# Altium PCB SIMCARD_PCB.PcbDoc
Units mm, origin at the board's own origin, x right, y up, seen from the top; angles counter-clockwise.
Board outline 43.08 x 76.9 mm, 2 copper layers (Top Layer, Bottom Layer); 48 components, 35 nets, 184 pads, 295 vias.
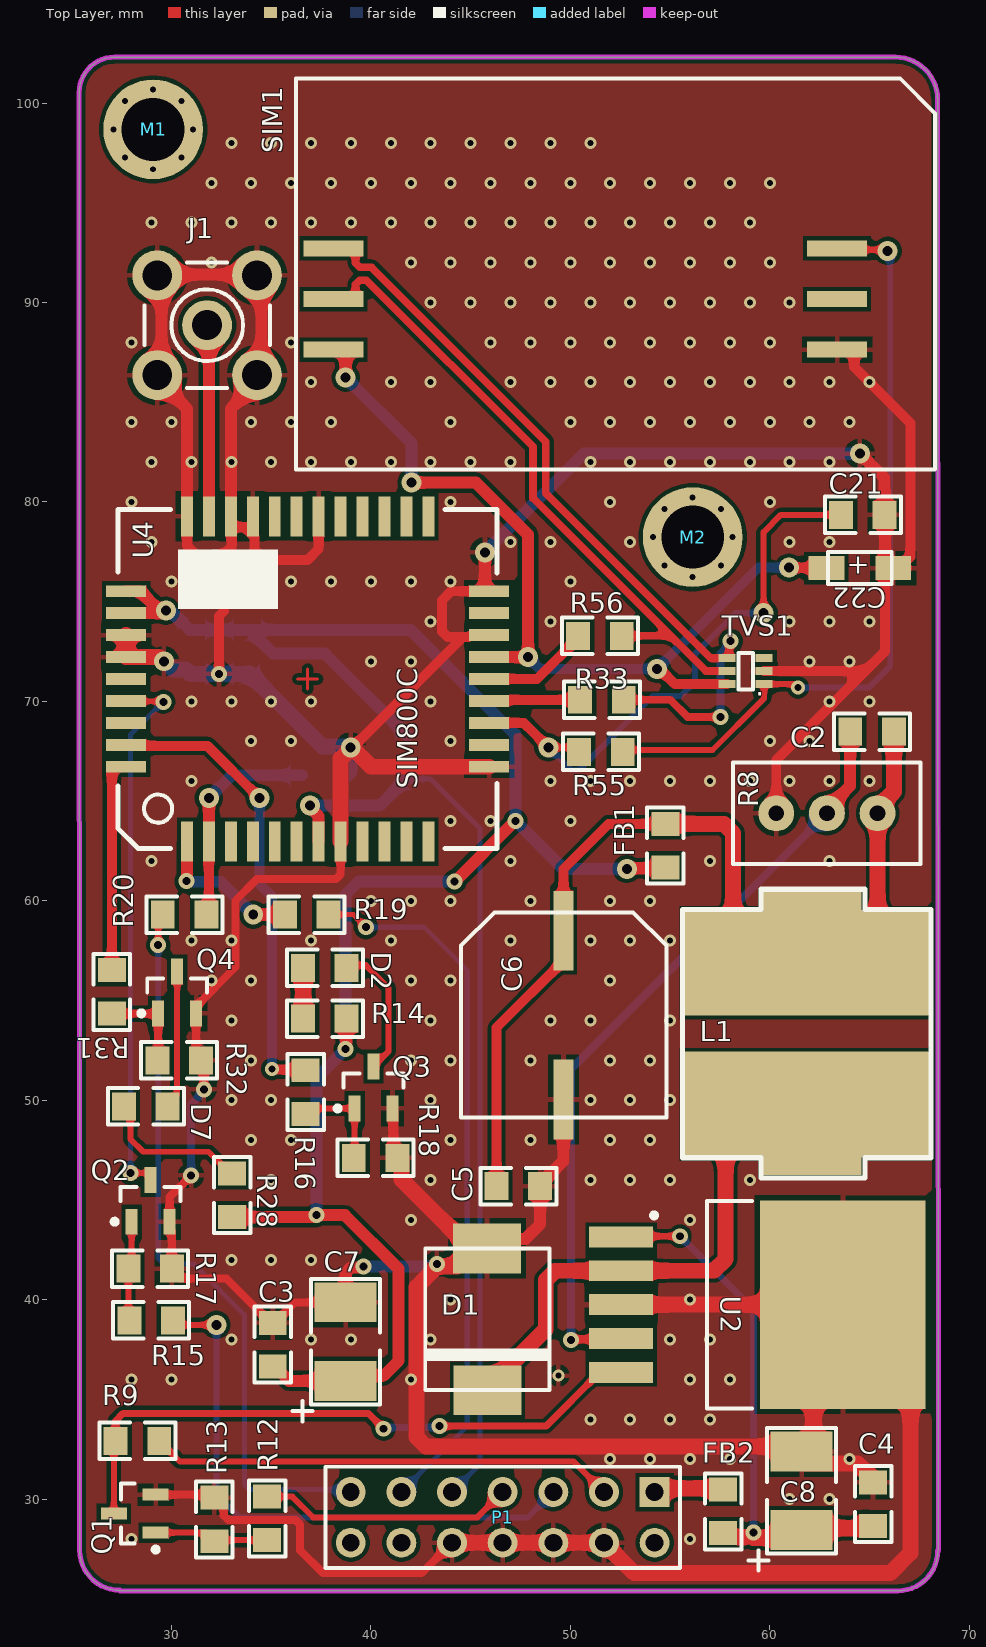
[diagram p0: Top Layer view]
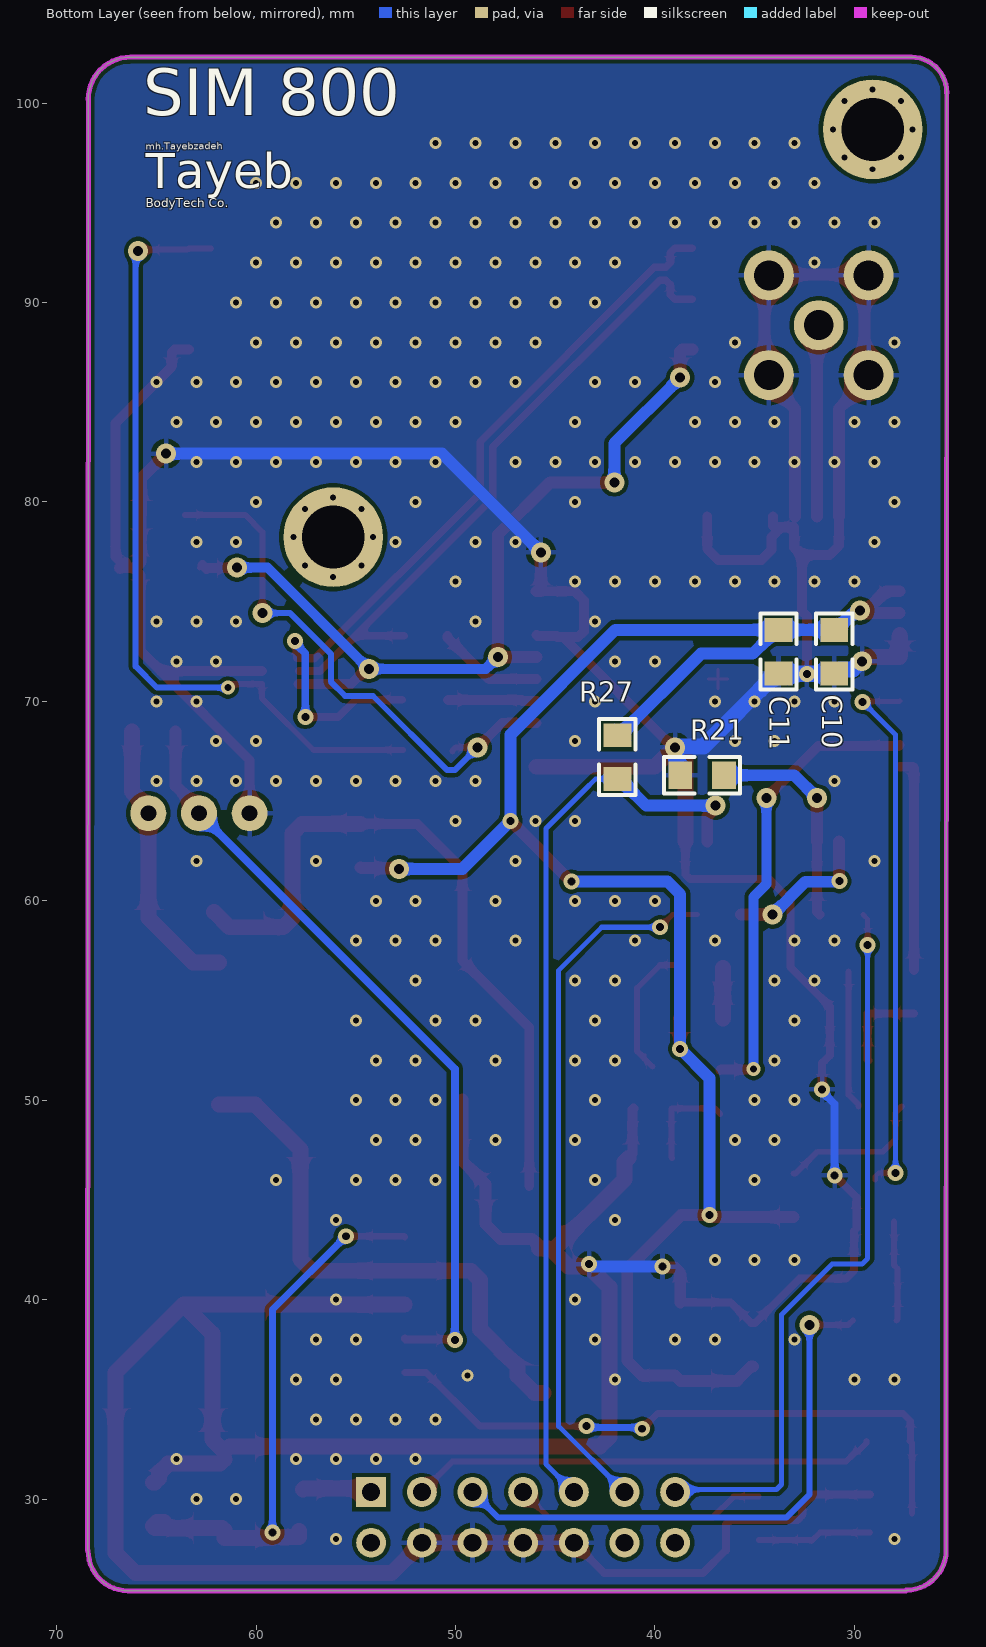
[diagram p1: Bottom Layer view, seen from below]

## Layer stack, top to bottom
Top Solder: solder mask 0.0102, Solder Resist, Dk 3.5
Top Layer: signal copper 0.0356
Dielectric 1: dielectric 0.32, FR-4, Dk 4.8
Bottom Layer: signal copper 0.0356
Bottom Solder: solder mask 0.0102, Solder Resist, Dk 3.5

## Board outline
25.4,27.432 25.372,100.514 cw(c27.146,100.526) 27.146,102.3 66.292,102.299 cw(c66.306,100.19) 68.415,100.19 68.453,27.413 68.421,27.413 cw(c66.421,27.4) 66.421,25.4 27.413,25.4 27.413,25.432 cw(c27.4,27.432)

## Design rules (kind name [scope] priority, off if disabled: settings)
Clearance "Stitching GND" [IsStitchingVia and InNet('GND') vs (IsVia and (Not IsStitchingVia)) Or IsPad] p1: gap=0.4 ignorepadtopadclearanceinfootprint=FALSE
Clearance [All] p2: gap=0.2 ignorepadtopadclearanceinfootprint=FALSE
DiffPairsRouting [All] p1: maxlimit=0.254 minlimit=0.254 mostfreqgap=0.254 toplayer_minwidth=0.381 toplayer_maxwidth=0.381 toplayer_prefwidth=0.381 bottomlayer_minwidth=0.381 bottomlayer_maxwidth=0.381 bottomlayer_prefwidth=0.381 maxuncoupledlength=12.7
PolygonConnect [All] p1: connectstyle=Relief reliefconductorwidth=0.254 reliefentries=4 polygonreliefangle="90 Angle" airgapwidth=0.254
RoutingVias [All] p1: holewidth=0.711 width=1.27 viastyle="Through Hole" minholewidth=0.35 minwidth=0.7 maxholewidth=0.4 maxwidth=0.8
SolderMaskExpansion [All] p1: expansion=0.102 istentingtop=FALSE
Width [All] p1: maxlimit=1.5 minlimit=0.254 preferedwidth=0.4
29 further rules are at their usual default settings.

## Classes and differential pairs
differential pair X: +X_P -X_N

## Components (designator, comment, footprint, x,y, rotation, side; value= is the part's Value field where it differs from the comment)
C2 "10nF" SMD_805 65.151,68.453 r90 top
C3 "100nF" SMD_805 35.052,37.719 r0 top
C4 "100nF" SMD_805 65.151,29.718 r0 top
C5 "100nF" SMD_805 47.371,45.72 r270 top
C6 "330uF" C_CYL_SMD 49.733,54.458 r90 top
C7 "100uF" C_B 38.735,37.973 r0 top
C8 "100uF" C_B 61.597,30.489 r0 top
C10 "100nF" SMD_805 30.988,72.517 r0 bottom
C11 "100nF" SMD_805 33.782,72.517 r0 bottom
C21 "22pF" SMD_805 64.643,79.375 r270 top
C22 "1uF" CAP_SMD_A 64.516,76.708 r0 top value=1nF
D1 "SM5822" DO_214_AB_SMC 45.847,38.989 r270 top
D2 "LED0" SMD_805 37.719,56.608 r90 top
D7 "LED0" SMD_805 28.738,49.666 r90 top
FB1 "FERRIT" smd_805 54.737,62.738 r0 top
FB2 "FERRIT" smd_805 57.683,29.413 r180 top
J1 "COAX-F" SMA 31.79,88.86 r180 top
L1 "33uH" INDUC_SMD 61.595,53.34 r90 top value=100uH
M1 "Screw" "Board Screw_No Silk" 29.083,98.679 r0 top
M2 "Screw" "Board Screw_No Silk" 56.134,78.232 r0 top
P1 "Header 7X2" HDR2X7 54.229,30.353 r180 top
Q1 "BC817" SOT23 28.287,29.271 r90 top
Q2 "BC817" SOT23 28.956,44.831 r0 top
Q3 "BC817" SOT23 40.132,50.512 r0 top
Q4 "BC817" SOT23 30.287,55.279 r0 top
R8 "RPot" POT 67.564,61.849 r90 top value=5K
R9 "10K" SMD_805 28.321,32.893 r90 top
R12 "680" SMD_805 34.823,29.058 r180 top
R13 "6.8K" SMD_805 32.131,28.956 r0 top
R14 "680" SMD_805 37.719,54.068 r90 top
R15 "1K" SMD_805 28.956,38.989 r270 top
R16 "1K" SMD_805 36.703,50.385 r0 top
R17 "10K" SMD_805 28.956,41.529 r90 top
R18 "10K" SMD_805 40.259,47.083 r90 top
R19 "1K" SMD_805 36.805,59.284 r90 top
R20 "1K" SMD_805 30.632,59.334 r270 top
R21 "5.6K" SMD_805 37.617,66.269 r90 bottom
R27 "1K" SMD_805 41.91,67.183 r180 bottom
R28 "680" SMD_805 33.02,45.212 r0 top
R31 "1K" SMD_805 26.985,55.406 r0 top
R32 "10K" SMD_805 30.414,51.977 r90 top
R33 "47" SMD_805 51.562,70.104 r270 top
R55 "47" SMD_805 51.562,67.437 r90 top
R56 "47" SMD_805 51.46,73.304 r270 top
SIM1 "SIM_CARD_SOCKET" SIM_CARD_HOLDER 67.081,100.025 r0 top
TVS1 "SMF05C" SMF05C_6L 58.801,71.501 r180 top
U2 "LM2596T-ADJ" LM2576_SMD 63.246,39.751 r270 top
U4 "SIM800C" SIM800C_3D 36.83,71.12 r90 top

## Footprints (in the part's own frame and the unit in brackets; to place one, negate y for a bottom-side part, rotate by r counter-clockwise, add the part's x,y. Pads: shape width x height; smd on the part's side, far side on the other; paste and mask are expansions set on the pad)
"Board Screw_No Silk" [mm]
  round 0.6 hole 0.3: S(-2,0) S(-1.414,-1.414) S(-1.414,1.414) S(0,-2) S(0,2) S(1.414,-1.414) S(1.414,1.414) S(2,0)
  round 5 hole 3.15 mask+0.1: S(0,0)
C_B [mm]
  rect 3.1x2 smd: 1(-0.002,-2.041) 2(-0.002,1.896)
  silkscreen extent -2.67,-4.07 1.73,3.07, body extent -1.4,-1.78 1.4,1.78, height 2.23
C_CYL_SMD [mm]
  rect 4x1 smd: 1(4.039,0.076) 2(-4.42,0.076)
  silkscreen extent -5.33,-5.08 4.97,5.22, body extent -5.33,-5.08 4.97,5.22, height 10
CAP_SMD_A [mm]
  rect 1.8x1.2 smd: 1(-1.676,-0.025) 2(1.676,-0.025)
  silkscreen extent -1.6,-0.81 1.6,0.79
DO_214_AB_SMC [mm]
  rect 2.5x3.4 smd: 1(-3.581,-0.025) 2(3.531,0)
  silkscreen extent -3.58,-3.12 3.53,3.1
HDR2X7 [mm] "Connector; Header; 7x2 Position"
  rect 1.5x1.5 hole 0.9: 1(0,0)
  round 1.5 hole 0.9: 2(0,2.54) 3(2.54,0) 4(2.54,2.54) 5(5.08,0) 6(5.08,2.54) 7(7.62,0) 8(7.62,2.54) 9(10.16,0) 10(10.16,2.54) 11(12.7,0) 12(12.7,2.54) 13(15.24,0) 14(15.24,2.54)
  silkscreen extent -1.27,-1.27 16.51,3.81
INDUC_SMD [mm]
  rect 2x5 smd: 1(-6.096,-0.508) 2(6.096,-0.508)
  rect 5.3x12.4 smd: 1(-3.556,-0.254) 2(3.556,-0.254)
  silkscreen extent -7.23,-6.48 7.24,5.97
LM2576_SMD [mm]
  rect 1.05x3.2 smd: 1(-3.4,-10.699) 2(-1.7,-10.699) 3(0,-10.699) 4(1.7,-10.699) 5(3.4,-10.699)
  rect 10.45x8.3 smd: 3(0,0.402)
  silkscreen extent -5.2,-9.17 5.2,-4.15, body extent -5.2,-6.4 5.2,3, height 4.65
POT [mm]
  round 1.8 hole 0.8: 1(2.54,2.159) 2(2.54,7.239) 3(2.54,4.699)
  silkscreen extent 0,0 5.08,9.4
SIM800C_3D [mm]
  rect 2x0.6 smd: 1(-8.152,6.05) 2(-8.152,4.95) 3(-8.152,3.85) 4(-8.152,2.75) 5(-8.152,1.65) 6(-8.152,0.55) 7(-8.152,-0.55) 8(-8.152,-1.65) 9(-8.152,-2.75) 10(-8.152,-3.85) 11(-8.152,-4.95) 12(-8.152,-6.05) 22(8.152,-6.05) 23(8.152,-4.95) 24(8.152,-3.85) 25(8.152,-2.75) 26(8.152,-1.65) 27(8.152,-0.55) 28(8.152,0.55) 29(8.152,1.65) 30(8.152,2.75) 31(8.152,3.85) 32(8.152,4.95) 33(8.152,6.05)
  rect 0.6x2 smd: 13(-4.4,-9.102) 14(-3.3,-9.102) 15(-2.2,-9.102) 16(-1.1,-9.102) 17(0,-9.102) 18(1.1,-9.102) 19(2.2,-9.102) 20(3.3,-9.102) 21(4.4,-9.102) 34(4.4,9.102) 35(3.3,9.102) 36(2.2,9.102) 37(1.1,9.102) 38(0,9.102) 39(-1.1,9.102) 40(-2.2,9.102) 41(-3.3,9.102) 42(-4.4,9.102)
  Top Layer lines w0.152: 0,0.5 0,-0.5 ; -0.5,0 0.5,0
  silkscreen extent -8.5,-9.5 8.5,9.5, body extent -7.85,-8.8 7.85,8.8, height 1.9
SIM_CARD_HOLDER [mm]
  rect 3x0.8 smd: 1(-28.959,-12.395) 2(-28.959,-9.855) 3(-28.959,-7.315) 4(-3.708,-12.395) 5(-3.708,-9.855) 6(-3.708,-7.315)
  silkscreen extent -30.84,-18.4 1.2,1.2, body extent -29.64,-17.2 0,0, height 2.6
SMA [mm]
  round 2.5 hole 1.5: 1(0,0) 2(-2.5,2.5) 3(2.5,2.5) 4(-2.5,-2.5) 5(2.5,-2.5)
  silkscreen extent -3.15,-3.15 3.15,3.15
SMD_805 [mm]
  rect 1.4x1.2 smd: 1(0.025,1.118) 2(0.025,-1.067)
  silkscreen extent -0.89,-1.88 0.94,1.93, body extent -0.66,-1.07 0.71,1.14, height 1.1
smd_805 [mm]
  rect 1.4x1.2 smd: 1(0.025,1.118) 2(0.025,-1.067)
  silkscreen extent -0.89,-1.88 0.94,1.93, body extent -0.66,-1.07 0.71,1.14, height 1.1
SMF05C_6L [mm]
  rect 0.85x0.4 smd: 1(-0.914,0.635) 2(-0.914,-0.015) 3(-0.914,-0.665) 4(0.936,-0.665) 5(0.936,-0.015) 6(0.936,0.635)
  silkscreen extent -0.36,-0.91 0.38,0.91
SOT23 [mm]
  rect 0.6x1.3 smd: 1(-0.95,-0.923) 2(0.95,-0.923) 3(0,1.177)
  silkscreen extent -1.92,-1.05 1.5,0.83, body extent -1.5,-0.57 1.5,0.83, height 1.1

## Part data
C2 C3 C4 C5 C10 C11 C21: library part Cap, "Capacitor", LatestRevisionDate=17-Jul-2002, LatestRevisionNote="Re-released for DXP Platform.", PackageReference=RAD-0.3, Published=8-Jun-2000, Publisher="Altium Limited"
C6 C7 C8 C22: library part "Cap Pol1", "Polarized Capacitor (Radial)", LatestRevisionDate=17-Jul-2002, LatestRevisionNote="Re-released for DXP Platform.", PackageReference=RB7.6-15, Published=8-Jun-2000, Publisher="Altium Limited"
D1: library part "Diode 11DQ03", "Schottky Rectifier", Code_JEDEC=DO-204-AL, ComponentLink1Description="Manufacturer Link", ComponentLink1URL=http://www.irf.com/, ComponentLink2Description=Datasheet, ComponentLink2URL=http://www.irf.com/product-info/datasheets/data/11dq03.pdf, DatasheetVersion=Dec-1997, LatestRevisionDate=17-Jul-2002, LatestRevisionNote="Re-released for DXP Platform.", PackageReference=DO-204AL, Published=8-Jun-2000, Publisher="Altium Limited"
D2 D7: "Typical INFRARED GaAs LED", LatestRevisionDate=08-Jul-2005, LatestRevisionNote="Mech Layer 1 removed.", PackageReference=LED-0, Published=8-Jun-2000, Publisher="Altium Limited"
FB1 FB2: library part "Fuse 1", "Fuse", LatestRevisionDate=17-Jul-2002, LatestRevisionNote="Re-released for DXP Platform.", PackageReference=PIN-W2/E2.8, Published=8-Jun-2000, Publisher="Altium Limited"
J1: "RF Coaxial PCB Connector, MCX; Thru-Hole, Right-Angle Mount Socket, Blunt Post Terminal, 50 Ohm Impedance", PackageDocument=04-Jul-1999, ComponentLink1Description="Manufacturer Link", ComponentLink1URL=http://www.amphenolrf.com/, DatasheetDocument=30-May-2003, DrillSize="Corresponds to nominal value.", LatestRevisionDate=15-Jul-2004, LatestRevisionNote="Component Replaced.", PackageReference=919-119J-51AX, PCB_Layout="Complies with manufacturer's recommendation.", Published=15-Jul-2004, Publisher="Altium Limited"
L1: library part Inductor, "Inductor", Current=3A, Code_IEC=1005, Code_JEITA=0402, LatestRevisionDate=29-May-2009, LatestRevisionNote="IPC-7351 Footprint Added.", PackageDescription="Chip Inductor", PackageReference=0402-A, Published=8-Jun-2000, Publisher="Altium Limited"
M1 M2: library part "Board Screw", "Board Screw With Spacer"
P1: "Header, 7-Pin, Dual row", LatestRevisionDate=17-Jul-2002, LatestRevisionNote="Re-released for DXP Platform.", Publisher="Altium Limited"
Q1: library part NPN, "NPN Bipolar Transistor", Code_JEDEC=TO-226-AA, LatestRevisionDate=17-Jul-2002, LatestRevisionNote="Re-released for DXP Platform.", PackageReference=TO-226, Published=8-Jun-2000, Publisher="Altium Limited"
Q2 Q3 Q4: library part 2N3904, "NPN General Purpose Amplifier", Code_JEDEC=TO-92A, ComponentLink1Description="Manufacturer Link", ComponentLink1URL=http://www.fairchildsemi.com/, ComponentLink2Description=Datasheet, ComponentLink2URL=http://www.fairchildsemi.com/ds/2N%2F2N3904.pdf, DatasheetVersion=1997, LatestRevisionDate=15-Jan-2003, LatestRevisionNote="PCB Footprint 'BCY-W3/D4.7' replaced", PackageReference=TO-92A, PackageVersion=Sep-1998, Published=8-Jun-2000, Publisher="Altium Limited"
R8: "Potentiometer", LatestRevisionDate=17-Jul-2002, LatestRevisionNote="Re-released for DXP Platform.", PackageReference=VR5, Published=8-Jun-2000, Publisher="Altium Limited", Set Position=0.5, Sim Note="Enter the Resistance value and the set point into parameter fields."
R9 R12 R13 R14 R15 R16 R17 R18 R19 R20 R21 R27 R28 R31 R32 R33 R55 R56: library part Res1, "Resistor", LatestRevisionDate=17-Jul-2002, LatestRevisionNote="Re-released for DXP Platform.", PackageReference=AXIAL-0.3, Published=8-Jun-2000, Publisher="Altium Limited"
TVS1: library part TVS_ARRAY
U2: "SIMPLE SWITCHER Power Converter 150 KHz 3A Step-Down Voltage Regulator", DigiKeyPartNumber=LM2596T-ADJ-ND, Manufacturer="National Semiconductor", PackageTopMarking="NSUZXYTT*LM2596T*-ADJ P+", PowerWise=N, ComponentLink1Description="LM2596 Datasheet", ComponentLink1URL=http://www.national.com/ds/LM/LM2596.pdf, ComponentLink2Description="LM2596 Web Page", ComponentLink2URL=http://www.national.com/pf/LM/LM2596.html, ComponentLink3Description="T05D Package Page", ComponentLink3URL=http://www.national.com/packaging/folders/t05d.html, CompType=Switcher, DatasheetVersion=May-2002, PackageDescription="TO-220, Molded, Stagger Bend, 5 Lead", PackageReference=T05D, PackageVersion="revA, Oct-1989", PartNumber=LM2596T-ADJ, PinCount=5, Published=4-Dec-2008, Publisher="Altium Limited", RoHS=O

## Via types
v1: diameter 0.6, hole 0.3, Top Layer to Bottom Layer, 252 vias
v2: diameter 0.8, hole 0.4, Top Layer to Bottom Layer, tented both sides, 21 vias
v3: diameter 1, hole 0.5, Top Layer to Bottom Layer, tented both sides, 19 vias
v4: diameter 0.7, hole 0.35, Top Layer to Bottom Layer, tented both sides, 2 vias
v5: diameter 0.6, hole 0.3, Top Layer to Bottom Layer, tented both sides, 1 vias

## Nets (pads, with @x,y where several pads share a name; then routed paths per layer and width w, separated by ;. In a path a pad name is that pad's centre, name@x,y a point inside that pad or via, vN(x,y) a via of type N, cw(c..) or ccw(c..) an arc to the next point about the centre after c; other vN are vias at no path point)
4V0: C3.2 C7.1 C10.2 C11.2 FB1.2 R14.2 R27.1 R28.2 U4.34 U4.35 | length 97
  Top Layer w0.6: U4.35 29.481,74.42 29.61,74.549 v3(29.718,74.549) 29.641,74.626 29.323,74.626 28.428,75.52 U4.34 ; R28.2 37.125,44.145 37.214,44.234 38.697,44.234 41.391,41.54 41.391,36.946 40.64,36.195 38.996,36.195 C7.1 35.898,35.932 35.177,36.652 C3.2 ; v2(38.735,52.578) 38.76,52.603 38.76,54.068 R14.2 ; v2(44.196,60.96) v2(47.244,64.008) ; v3(52.832,61.595) 52.87,61.633 54.724,61.633 FB1.2
  Bottom Layer w0.6: v3(29.718,74.549) 29.795,74.472 30.025,74.472 30.913,73.584 C10.2 C11.2 C11.2@33.907,73.584 ; v2(37.268,44.234) 37.268,51.111 v2(38.735,52.578) 38.735,60.325 39.37,60.96 v2(44.196,60.96) ; R27.1 41.785,68.301 37.695,72.39 35.101,72.39 C11.2@33.907,73.584 ; v3(52.832,61.595) 49.657,61.595 v2(47.244,64.008) 47.244,68.326 41.986,73.584 C11.2@33.907,73.584
5V0: P1.3 R9.2 | length 23.4
  Top Layer w0.3: R9.2 29.388,32.818 29.838,32.368 29.938,32.368 30.429,31.877 50.165,31.877 P1.3
GND: C3.1 C4.1 C5.1 C6.2 C7.2 C8.2 C10.1 C11.1 C21.1 C22.2 D1.1 J1.2 J1.3 J1.4 J1.5 P1.4 P1.6 P1.8 P1.10 Q1.2 Q2.2 Q3.2 Q4.2 R8.2 R13.1 R17.2 R18.2 R21.1 R32.2 SIM1.4 TVS1.2 U2.3 U4.8 U4.13 U4.19 U4.21 U4.27 U4.30 U4.31 U4.33 U4.36 U4.37 | length 328.5
  Top Layer w0.4: Q1.2 32.009,30.221 R13.1@32.131,30.099 ; v2(30.988,46.228) 29.906,45.146 Q2.2 29.906,43.558 30.023,43.441 R17.2 30.023,41.454 30.423,41.054 32.76,41.054 34.977,38.837 C3.1 35.177,38.837 36.21,39.869 C7.2 ; v2(31.623,50.546) 31.623,51.86 R32.2 31.237,52.246 Q4.2 31.237,54.706 33.202,56.671 33.202,59.999 34.29,61.087 38.246,61.087 38.48,61.321 U4.8 ; R13.1 32.222,30.074 32.622,29.674 32.622,29.19 32.856,28.956 36.215,28.956 36.449,28.722 36.449,27.432 37.592,26.289 42.545,26.289 P1.10
  Top Layer w0.5: U4.33 30.78,77.805 31.242,77.343 32.639,77.343 ; v2(32.385,71.374) 32.385,74.272 32.639,74.526 32.639,77.343 ; U4.30 34.08,78.79 34.03,78.74 33.655,78.74 ; U4.27 37.38,77.639 36.83,77.089 34.671,77.089 34.163,77.597 34.163,78.232 33.655,78.74 ; v3(38.989,67.691) 39.043,67.691 39.089,67.691 44.568,73.17 ; Q3.2 41.132,49.539 41.132,47.302 R18.2 ; U4.21@45.72,75.52 44.024,75.52 43.561,75.057 43.561,73.513 43.854,73.22 44.889,73.22 44.939,73.27 45.882,73.27 U4.19 ; TVS1.2 64.785,71.516 ; R8.2 60.325,67.056 64.785,71.516 ; SIM1.4 64.08,87.63 64.23,87.48 64.23,86.773 67.056,83.947 67.056,77.246 C22.2@66.842,77.033 ; C22.2@66.573,76.683 C22.2 66.136,76.683 65.786,76.333 65.786,72.517 64.785,71.516 ; 32.639,77.343 33.02,77.724 33.02,78.74 33.655,78.74
  Top Layer w0.6: J1.3 29.29,86.153 30.78,84.663 U4.33 ; J1.3@29.504,86.4 29.504,91.4 34.504,91.4 J1.2@34.504,86.4 ; U4.31 32.98,84.669 34.29,85.979 J1.2 ; C7.2 38.733,41.347 39.004,41.618 39.586,41.618 v2(39.624,41.656) ; D1.1@45.568,42.443 45.695,42.57 46.177,43.053 47.752,43.053 48.489,43.79 C5.1 48.489,45.795 49.657,46.963 C6.2 ; v3(45.72,77.47) 45.72,75.52 U4.21 ; v3(64.516,82.423) 65.761,81.178 C21.1 65.786,79.324 65.786,76.983 66.086,76.683 C22.2@66.136,76.683 ; C22.2@66.573,76.937 C22.2@66.827,76.683
  Top Layer w0.8: U4.36 U4.37 29.353,72.22 29.564,72.009 v3(29.618,72.009) ; U4.8 38.48,67.128 38.989,67.637 v3(38.989,67.691) ; v3@39.043,67.691 40.014,66.72 U4.13 ; R18.2 41.526,46.908 41.526,46.035 45.118,42.443 44.326,41.652 43.312,41.652 42.76,41.099 42.291,40.631 42.291,33.108 42.76,32.639 61.341,32.639 C8.2 62.195,32.985 62.195,38.298 U2.3@63.648,39.751 ; P1.10 P1.8 P1.6 P1.4 53.213,26.289 66.04,26.289 67.056,27.305 67.056,36.343 U2.3@63.648,39.751 ; D1.1@45.372,42.57 45.695,42.57 D1.1 ; U2.3@52.547,39.751 U2.3@63.648,39.751 ; C8.2@61.593,31.995 61.803,31.785 63.206,31.785 63.214,31.777 64.408,31.777 64.876,31.308 64.876,31.036 65.076,30.836 C4.1
  Bottom Layer w0.4: v2(30.988,46.228) 30.988,49.803 31.623,50.438 v2(31.623,50.546)
  Bottom Layer w0.6: v2(39.624,41.656) 43.126,41.656 43.253,41.783 v2(43.307,41.783) ; v3(45.72,77.47) 50.673,82.423 v3(64.516,82.423)
  Bottom Layer w0.8: v3(29.618,72.009) 29.672,72.009 30.082,71.599 30.713,71.599 30.913,71.399 C10.1 31.039,71.374 v2(32.385,71.374) 33.782,71.374 C11.1 33.907,71.399 37.578,67.729 38.951,67.729 v3(38.989,67.691) 38.989,67.637 38.935,67.583 38.935,66.494 R21.1
  other v1: 28,28 56,28 61,30 63,30 52,32 54,32 56,32 58,32 64,32 51,34 53,34 55,34 57,34 28,36 30,36 42,36 56,36 58,36 33,38 37,38 39,38 43,38 55,38 57,38 44,40 56,40 33,42 35,42 37,42 42,44 56,44 35,46 43,46 51,46 53,46 55,46 59,46 34,48 36,48 44,48 48,48 52,48 54,48 33,50 35,50 43,50 51,50 53,50 55,50 34,52 42,52 44,52 48,52 52,52 54,52 33,54 43,54 49,54 51,54 55,54 32,56 34,56 42,56 44,56 52,56 31,58 33,58 37,58 41,58 47,58 51,58 53,58 55,58 40,60 42,60 44,60 48,60 52,60 54,60 29,62 47,62 57,62 63,62 44,64 46,64 50,64 31,66 49,66 51,66 53,66 55,66 57,66 59,66 61,66 63,66 65,66 34,68 36,68 44,68 60,68 62,68 31,70 33,70 35,70 37,70 43,70 63,70 65,70 40,72 42,72 62,72 64,72 43,74 49,74 61,74 63,74 65,74 30,76 32,76 34,76 36,76 38,76 40,76 42,76 44,76 50,76 29,78 47,78 49,78 53,78 61,78 63,78 28,80 44,80 52,80 60,80 29,82 31,82 33,82 35,82 37,82 39,82 41,82 43,82 45,82 47,82 51,82 53,82 55,82 57,82 59,82 61,82 63,82 28,84 30,84 34,84 36,84 38,84 44,84 50,84 52,84 54,84 56,84 58,84 60,84 62,84 64,84 37,86 41,86 43,86 47,86 49,86 51,86 53,86 55,86 57,86 59,86 61,86 63,86 65,86 28,88 36,88 46,88 48,88 50,88 52,88 54,88 56,88 58,88 60,88 43,90 45,90 47,90 49,90 51,90 53,90 55,90 57,90 59,90 61,90 32,92 42,92 44,92 46,92 48,92 50,92 52,92 54,92 56,92 58,92 60,92 29,94 31,94 33,94 35,94 37,94 39,94 41,94 43,94 45,94 47,94 49,94 51,94 53,94 55,94 57,94 59,94 32,96 34,96 36,96 38,96 40,96 42,96 44,96 46,96 48,96 50,96 52,96 54,96 56,96 58,96 60,96 33,98 35,98 37,98 39,98 41,98 43,98 45,98 47,98 49,98 51,98
  other v5: 49.403,36.195
MCU_RX3: P1.11 R19.2 | length 35.6
  Top Layer w0.254: R19.2 39.116,59.309 v2(39.751,58.674)
  Bottom Layer w0.254: v2(39.751,58.674) 42.672,58.674 44.831,56.515 44.831,33.655 P1.11
MCU_TX3: P1.13 R20.2 | length 36.8
  Top Layer w0.254: v2(29.337,57.785) 29.337,59.08 R20.2
  Bottom Layer w0.254: v2(29.337,57.785) 29.337,42.059 29.613,41.783 31.115,41.783 33.655,39.243 33.655,30.734 33.909,30.48 38.862,30.48 P1.13
NET_LIGHT: R16.1 U4.41 | length 23.3
  Top Layer w0.5: U4.41 27.778,67.77 31.798,67.77 v3(34.417,65.151) ; v4(35.052,51.562) 35.082,51.532 36.699,51.532 R16.1
  Bottom Layer w0.5: v3(34.417,65.151) 34.417,60.833 35.052,60.198 v4(35.052,51.562)
NetC2_1: C2.1 R8.3 U2.4 | length 38.8
  Top Layer w0.4: v2(50.038,37.973) 50.077,38.012 52.508,38.012 U2.4
  Top Layer w0.6: R8.3 62.865,64.598 64.033,65.766 C2.1
  Bottom Layer w0.4: v2(50.038,37.973) 50.038,51.562 R8.3
NetC2_2: C2.2 C5.2 C6.1 FB1.1 L1.2 R8.1 | length 49.8
  Top Layer w0.5: C5.2 46.304,53.643 49.657,56.996 C6.1 49.657,61.595 51.918,63.856 FB1.1
  Top Layer w0.8: FB1.1 57.697,63.856 58.166,63.387 58.166,59.146 58.638,58.674 61.341,58.674 L1.2@62.103,59.436 ; L1.2@61.849,56.896 63.155,56.896 65.405,59.146 R8.1 65.405,64.66 66.218,65.472 C2.2
NetC4_2: C4.2 C8.1 FB2.1 U2.1 | length 27.3
  Top Layer w0.35: U2.1 52.576,43.18 v2(55.499,43.18)
  Top Layer w0.8: FB2.1@57.858,28.396 57.858,28.096 58.805,28.096 ; v2@59.182,28.058 C8.1@61.593,28.058 ; C8.1 61.697,28.55 65.075,28.55 C4.2 64.976,28.851 C4.2@64.621,28.851
  Bottom Layer w0.35: v2(55.499,43.18) 59.182,39.497 v2(59.182,28.321)
NetD1_2: D1.2 L1.1 U2.2 | length 27.2
  Top Layer w0.8: D1.2@45.593,35.331 46.043,35.331 46.893,36.181 46.893,36.631 48.768,38.506 48.768,40.982 49.237,41.451 U2.2 57.199,41.451 57.785,42.037 57.785,47.534 60.035,49.784 L1.1@61.849,49.784
NetD2_1: D2.1 R14.1 | length 2.5
  Top Layer w0.8: R14.1 D2.1
NetD2_2: D2.2 Q3.3 | length 6.9
  Top Layer w0.3: D2.2 38.921,56.769 39.751,56.769 40.894,55.626 40.894,52.451 Q3.3
NetD7_1: D7.1 R28.1 | length 7.6
  Top Layer w0.3: D7.1 27.94,49.371 27.94,48.055 28.578,47.417 31.858,47.417 32.945,46.33 R28.1
NetD7_2: D7.2 Q4.3 | length 7
  Top Layer w0.3: D7.2 29.804,49.791 30.287,50.274 Q4.3
NetJ1_1: J1.1 U4.32 | length 9.7
  Top Layer w0.6: U4.32 31.88,88.776 J1.1@32.004,88.9
NetQ1_1: Q1.1 R12.1 R13.2 | length 5.8
  Top Layer w0.3: Q1.1 31.725,28.321 R13.2 32.207,27.94 R12.1
NetQ1_3: Q1.3 R9.1 U2.5 | length 31.7
  Top Layer w0.3: Q1.3 27.11,32.825 R9.1
  Top Layer w0.35: R9.1 27.196,32.926 27.196,33.927 27.559,34.29 39.878,34.29 v2(40.64,33.528) ; v2(43.434,33.655) 48.776,33.655 51.472,36.351 U2.5
  Bottom Layer w0.35: v2(40.64,33.528) 40.703,33.591 43.37,33.591 v2(43.434,33.655)
NetQ2_1: Q2.1 R15.2 R17.1 | length 5
  Top Layer w0.3: R15.2 27.838,39.014 R17.1 28.006,41.722 Q2.1
NetQ3_1: Q3.1 R16.2 R18.1 | length 5.1
  Top Layer w0.3: R16.2 36.999,49.589 Q3.1 39.182,47.149 R18.1
NetQ4_1: Q4.1 R31.2 R32.1 | length 4.7
  Top Layer w0.4: R31.2 29.32,54.339 Q4.1 29.337,52.043 R32.1
NetR19_1: R19.1 U4.1 | length 7.6
  Top Layer w0.6: v2(30.757,60.983) 30.78,61.006 U4.1 ; v3(34.102,59.309) R19.1
  Bottom Layer w0.6: v2(30.757,60.983) 30.786,60.954 32.457,60.954 v3(34.102,59.309)
NetR20_1: R20.1 R21.2 U4.2 | length 11
  Top Layer w0.5: R20.1 31.877,59.436 31.877,62.965 U4.2
  Top Layer w0.6: v3(31.877,65.151) 31.88,65.148 U4.2
  Bottom Layer w0.6: v3(31.877,65.151) 33.02,66.294 R21.2
NetR55_2: R55.2 SIM1.6 TVS1.1 | length 40.3
  Top Layer w0.3: R55.2@52.629,67.562 57.125,67.562 59.54,69.977 59.715,70.153 TVS1.1 61.125,70.866 61.307,70.683 v4(61.416,70.683) ; SIM1.6@62.273,92.71 SIM1.6 63.436,92.647 65.849,92.647 v3(65.913,92.583)
  Bottom Layer w0.3: v4(61.416,70.683) 64.968,70.683 66.04,71.755 66.04,92.456 v3(65.913,92.583)
PWRKEY: Q2.3 U4.39 | length 27.4
  Top Layer w0.254: U4.39 27.75,69.998 29.57,69.998 v2(29.591,69.977) ; v2(27.94,46.355) 28.783,46.355 28.956,46.182 Q2.3
  Bottom Layer w0.254: v2(27.94,46.355) 27.94,68.326 v2(29.591,69.977)
SIM_CLK: R33.2 U4.16 | length 4.5
  Top Layer w0.5: U4.16 46.632,70.02 46.69,70.079 R33.2@50.368,70.079
SIM_DATA: C21.2 R55.1 U4.15 | length 28.5
  Top Layer w0.3: v3(48.895,67.691) 49.994,67.691 50.144,67.541 R55.1@50.144,67.481 ; v3(59.69,74.422) 59.69,78.486 60.554,79.35 C21.2
  Top Layer w0.5: U4.15 47.666,68.92 48.152,68.434 v3(48.895,67.691)
  Bottom Layer w0.3: v3(48.895,67.691) 50.038,66.548 50.419,66.548 54.137,70.266 55.534,70.266 56.256,70.988 56.256,72.385 58.293,74.422 v3(59.69,74.422)
SIM_EN: P1.5 R15.1 | length 28.7
  Top Layer w0.3: R15.1 30.302,38.735 v3(32.258,38.735)
  Bottom Layer w0.3: v3(32.258,38.735) 32.258,30.226 33.401,29.083 47.879,29.083 P1.5
SIM_P_SW: P1.7 R12.2 | length 12.8
  Top Layer w0.3: R12.2 36.058,30.124 37.1,29.083 45.339,29.083 P1.7
SIM_RI: P1.9 R27.2 U4.7 | length 45.9
  Top Layer w0.6: v3(36.957,64.77) 36.957,64.662 37.38,64.239 U4.7
  Bottom Layer w0.254: R27.2 42.977,66.116 43.561,65.532 45.466,63.627 45.466,31.75 P1.9
  Bottom Layer w0.6: v3(36.957,64.77) 40.438,64.77 41.785,66.116 R27.2
SIM_RST: R56.2 U4.17 | length 5.4
  Top Layer w0.5: U4.17 48.335,71.12 50.394,73.179 R56.2
SIM_VDD: C22.1 SIM1.1 TVS1.6 U4.18 | length 45
  Top Layer w0.254: C22.1@62.687,76.835 C22.1
  Top Layer w0.5: v3(54.339,71.628) 54.475,71.628 55.237,70.866 TVS1.6 ; v3(60.96,76.708) 60.973,76.695 62.418,76.695 62.483,76.631 C22.1@62.687,76.835
  Top Layer w0.6: SIM1.1 38.635,87.63 38.735,87.53 v3(38.735,86.233) ; v3(42.037,80.972) 45.266,80.972 47.879,78.359 v3(47.879,72.22) 46.632,72.22 U4.18
  Bottom Layer w0.5: v3(47.879,72.22) 48.471,71.628 54.475,71.628 54.475,71.747 59.436,76.708 v3(60.96,76.708)
  Bottom Layer w0.6: v3(38.735,86.233) 42.037,82.931 v3(42.037,80.972)
STATUS: R31.1 U4.42 | length 10.9
  Top Layer w0.5: R31.1 27.01,66.67 27.06,66.72 U4.42
VCC_IN: FB2.2 P1.1 | length 3.2
  Top Layer w0.8: P1.1@54.483,30.607 54.546,30.543 57.594,30.543 FB2.2
X_N: R56.1 SIM1.2 TVS1.5 | length 32.5
  Top Layer w0.381: SIM1.2 39.018,90.17 39.228,90.38 39.228,90.899 39.451,91.123 39.766,91.123 48.129,82.76 48.129,80.181 55.031,73.279 ; R56.1 55.031,73.279 ; TVS1.5 57.858,71.524 56.787,71.524 55.031,73.279
X_P: R33.1 SIM1.3 TVS1.4 | length 40.3
  Top Layer w0.381: SIM1.3 39.018,92.71 39.228,92.5 39.228,91.981 39.451,91.757 40.029,91.757 48.764,83.023 48.764,80.444 57.05,72.159 57.858,72.159 TVS1.4 57.949,72.166 57.959,72.176 57.959,72.945 v2(58.039,73.025) ; R33.1 55.012,70.079 55.876,69.215 v2(57.531,69.215)
  Bottom Layer w0.381: v2(57.531,69.215) 57.531,72.404 58.039,72.912 v2(58.039,73.025)
pads on no net: M1.S M2.S P1.2 P1.12 P1.14 SIM1.5 TVS1.3 U4.3 U4.4 U4.5 U4.6 U4.9 U4.10 U4.11 U4.12 U4.14 U4.20 U4.22 U4.23 U4.24 U4.25 U4.26 U4.28 U4.29 U4.38 U4.40

## Polygon pours and split planes (outlines as drawn)
GND on Top Layer "GND_L01_P000" (solid, remove dead copper, pour order 0): 24.003,103.505 24.511,102.997 69.596,102.997 69.596,24.13 69.215,23.749 24.892,23.749
GND on Bottom Layer "GND_L02_P001" (solid, remove dead copper, pour order 1): 24.384,102.87 68.453,102.87 69.215,102.108 68.834,101.727 68.834,24.765 24.384,24.765 24.13,25.019 24.13,102.743 24.384,102.997

## Keep-outs
Keep-Out Layer:
  lines w0.25: 25.372,100.514 25.4,27.432 ; 27.146,102.3 66.292,102.299 ; 27.413,25.4 66.421,25.4 ; 68.415,100.19 68.453,27.413
  lines w0.254: 25.372,100.514 cw(c27.146,100.526) 27.146,102.3 ; 25.4,27.432 ccw(c27.4,27.432) 27.413,25.432 ; 66.292,102.299 cw(c66.306,100.19) 68.415,100.19 ; 66.421,25.4 ccw(c66.421,27.4) 68.421,27.413

## Other copper
Top Layer:
  region net GND: 63.754,71.501 63.881,71.374 63.881,70.866 64.135,70.866 64.516,71.247

## Silkscreen, mask and mechanical layers (free items; w line width, h text height)
Bottom Overlay:
  text "SIM 800" at 65.659,98.6 h4
  text "mh.Tayebzadeh" at 65.53,97.526 h0.6 r359.73
  text "Tayeb" at 65.532,95.151 h3
  text "BodyTech Co." at 65.532,94.629 h0.75

## Text inside footprints (layer, text, board x,y; h text height)
C22: Top Overlay "+" at 63.856,76.403 h1